# Altium PCB nrf7002_qfaa.PcbDoc
Units mil, origin at the board's own origin, x right, y up, seen from the top; angles counter-clockwise.
Board outline 738 x 600 mil, 4 copper layers (Top Layer, Mid-Layer 1, Mid-Layer 2, Bottom Layer), stack 62.315 mil thick; 22 components, 31 nets, 106 pads, 136 vias.
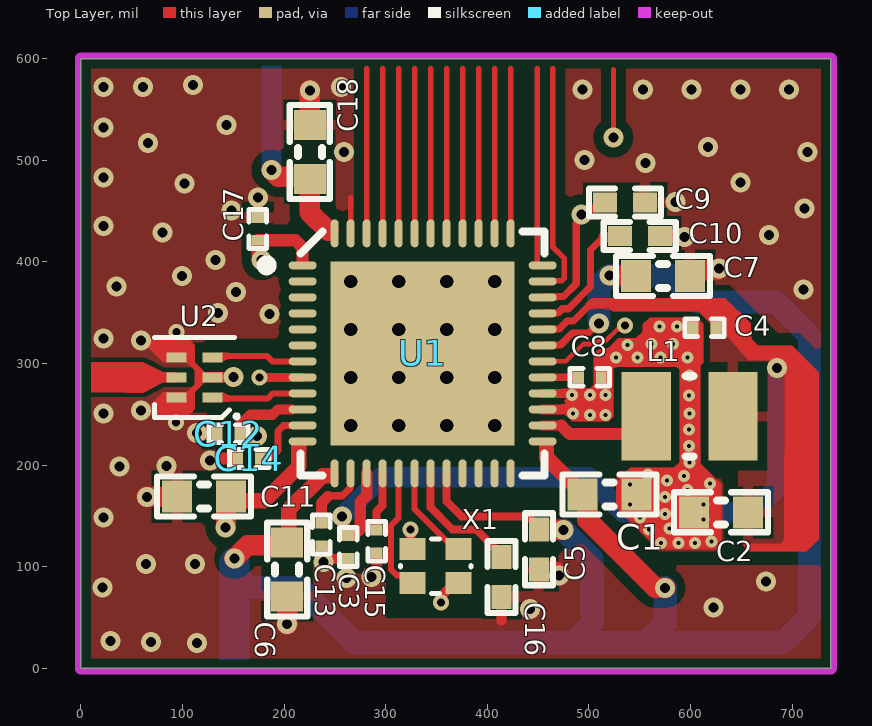
[diagram p0: Top Layer view]
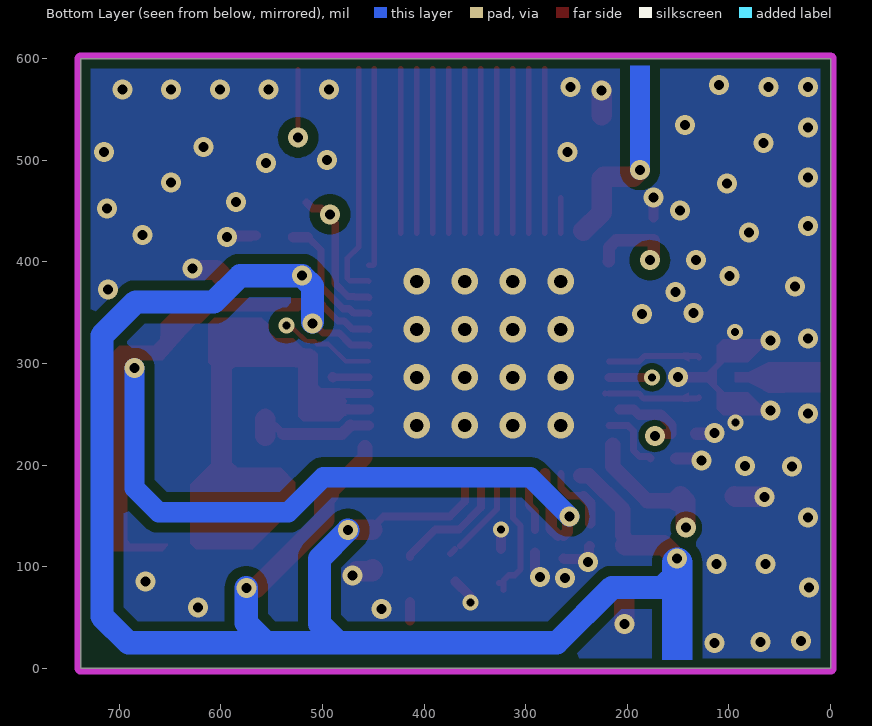
[diagram p1: Bottom Layer view, seen from below]
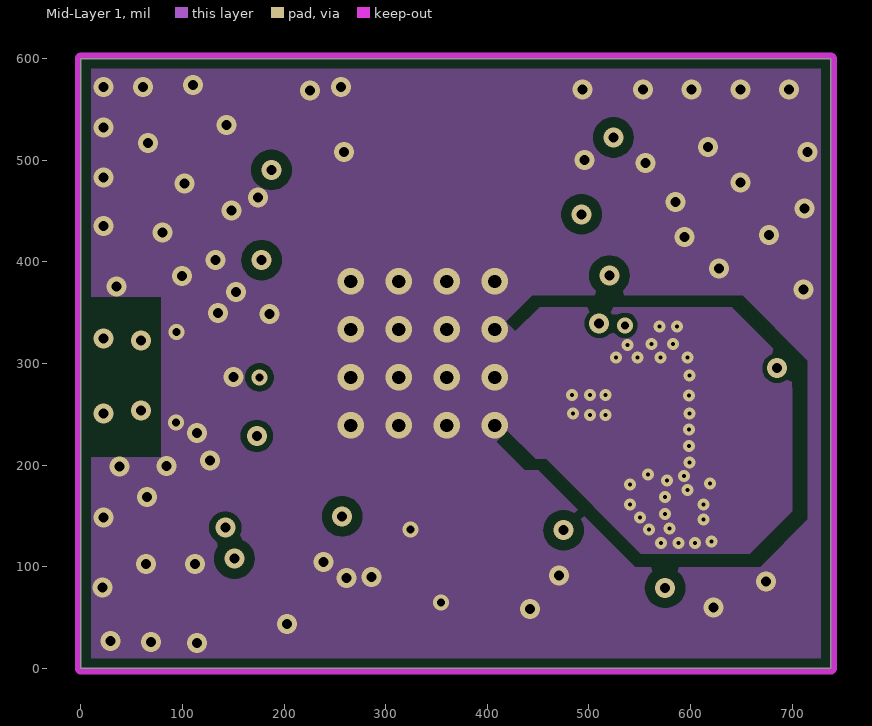
[diagram p2: Mid-Layer 1]
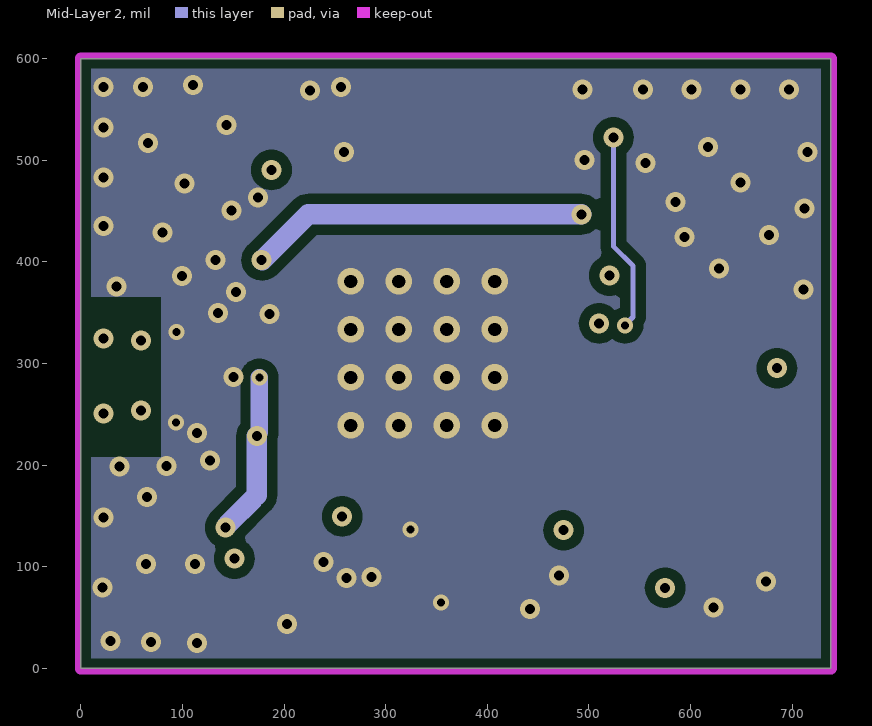
[diagram p3: Mid-Layer 2]
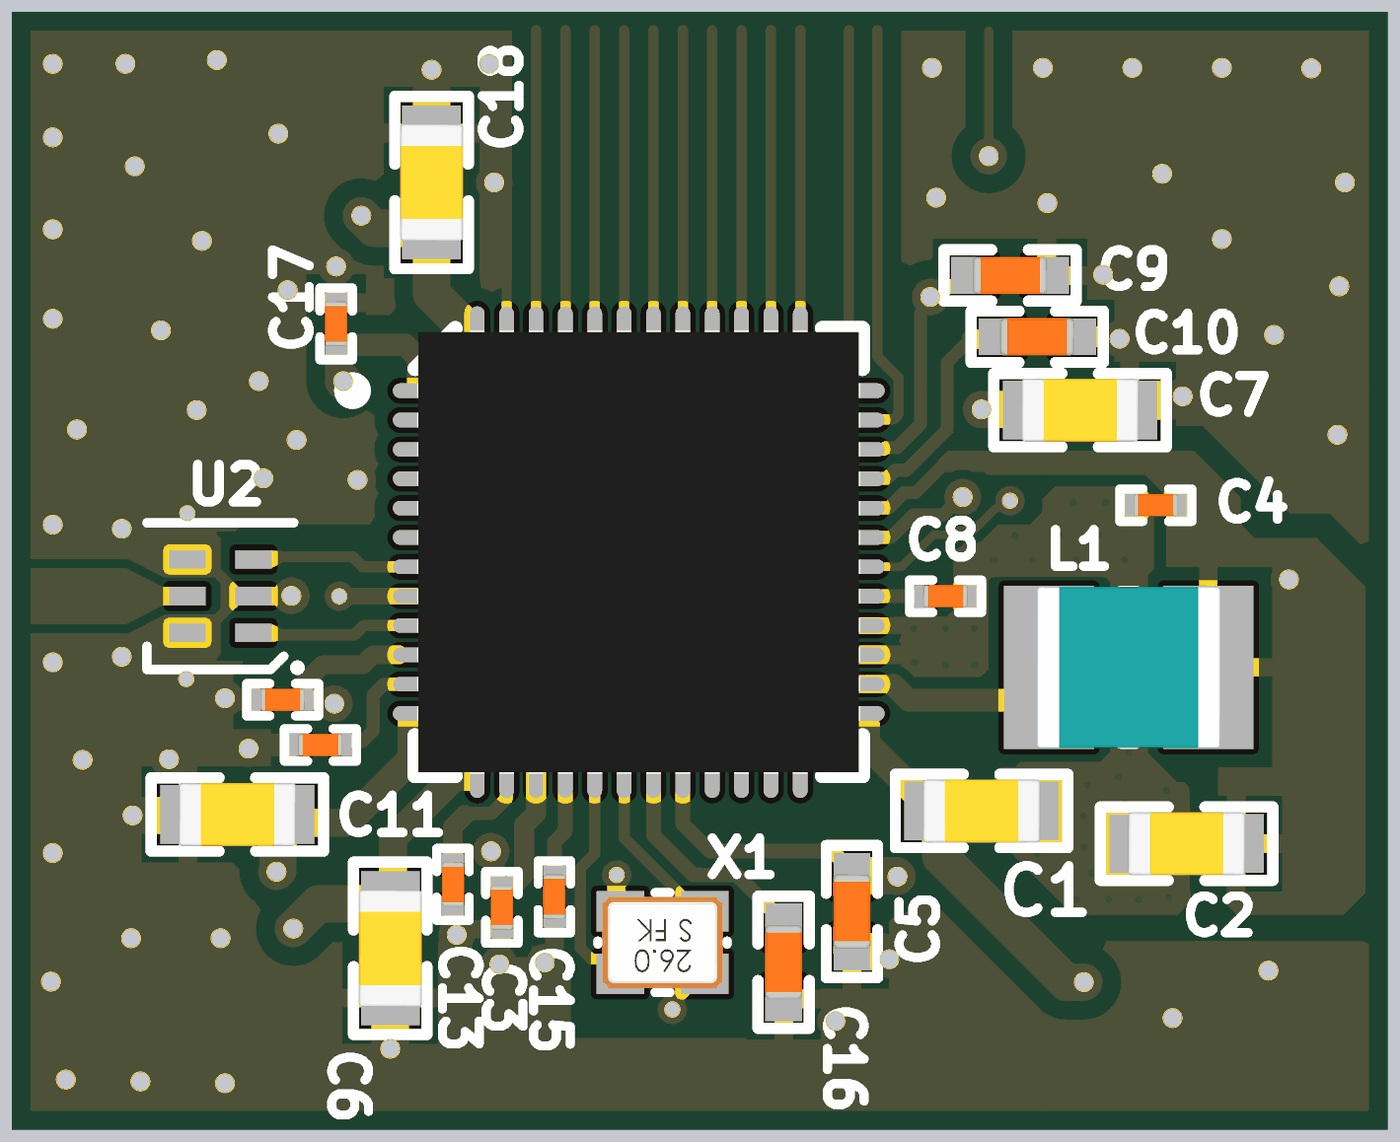
[diagram p4: 3D render of the assembled board from above, using the file's embedded part models]

## Layer stack, top to bottom
Top Solder: solder mask 1.063, Solder Resist, Dk 3.5
Top Layer: signal copper 0.689
Dielectric1: prepreg 3.5, FR-4, Dk 4.2
Mid-Layer 1: signal copper 1.378
Dielectric2: prepreg 51.1811, FR-4, Dk 4.2
Mid-Layer 2: signal copper 1.378
Dielectric3: prepreg 3.5, FR-4, Dk 4.2
Bottom Layer: signal copper 0.689
Bottom Solder: solder mask 1.063, Solder Resist, Dk 3.5

## Board outline
0,0 0,600 738,600 738,0

## Design rules (kind name [scope] priority, off if disabled: settings)
Clearance Clearance_2 [InNet('PALDO') vs OnLayer('Mid-Layer 1')] p1: gap=10 ignorepadtopadclearanceinfootprint=FALSE except(6: Via-Fill Via-Poly Via-Region)
Clearance Clearance_4 [InNet('PALDO') vs OnLayer('Bottom Layer')] p2: gap=10 ignorepadtopadclearanceinfootprint=FALSE except(6: Via-Fill Via-Poly Via-Region)
Clearance Clearance_1 [InNet('ant') vs InNet('GND')] p3: gap=4.76 ignorepadtopadclearanceinfootprint=FALSE except(5: Arc-Arc Arc-Track Arc-Fill Arc-Poly Arc-Region Track-Track Track-Fill Track-Poly Track-Region SMDPad-Fill SMDPad-Poly SMDPad-Region)
Clearance Clearacnce_microvia [AsMM(ViaDiameter) = 0.3 vs AsMM(ViaDiameter) = 0.3] p4: gap=3.94 ignorepadtopadclearanceinfootprint=FALSE
Clearance Polygon_Clearance [(InNamedPolygon('Top_Layer-GND')) or (InNamedPolygon('Bottom_Layer-GND')) or (InNamedPolygon('Mid_Layer_1-GND')) or (InNamedPolygon('Mid_Layer_2-GND'))] p5: gap=10 ignorepadtopadclearanceinfootprint=FALSE except(0: Arc-Hole Track-Hole SMDPad-Hole THPad-Hole Via-Hole Fill-Hole Poly-Hole Region-Hole Text-Hole)
Clearance [All] p6: gap=4.76 ignorepadtopadclearanceinfootprint=FALSE except(5: Arc-Arc Arc-Track Track-Track)
ComponentClearance [All] p1 off: gap=10 collisioncheckmode=3 verticalgap=10 showdistances=FALSE
FabricationTestPointUsage TestPointUsage [All] p1: valid=0 allowmultiple=FALSE
FabricationTestpoint Testpoint [All] p1: side=3 testpointundercomponent=TRUE minsize=40 maxsize=100 preferedsize=60 minholesize=0 maxholesize=40 preferedholesize=32 testpointgrid=1 allowsidetop=TRUE allowsidebottom=TRUE usegrid=TRUE gridtolerance=0.01
Height [All] p1 off: minheight=0 maxheight=1000 prefheight=500
HoleSize [All] p1: absolutevalues=TRUE maxlimit=300 minlimit=3.94 maxpercent=80.000 minpercent=20.000
MinimumAnnularRing [All] p1 off: minimumring=6
PolygonConnect PolygonConnect_1 [isVia and innet(gnd)] p1: connectstyle=Direct reliefconductorwidth=10 reliefentries=4 polygonreliefangle="90 Angle" airgapwidth=10
PolygonConnect [All] p2: connectstyle=Relief reliefconductorwidth=10 reliefentries=4 polygonreliefangle="90 Angle" airgapwidth=10
RoutingVias [All] p1: holewidth=12.01 width=24 viastyle="Through Hole" minholewidth=3.94 minwidth=11.81 maxholewidth=12.01 maxwidth=24.02 useviatemplates=TRUE viatemplateguid#1={EDF5FEF7-A820-4EA2-9A2F-3AF23343353B} viatemplatename#1=v50h25m0mx0
SilkToSolderMaskClearance SilkscreenOverComponentPads [IsPad] p1: minsilkscreentomaskgap=10 clearancetoexposedcopper=TRUE
SolderMaskExpansion [IsVia] p1: expansion=3 istentingtop=TRUE
SolderMaskExpansion SolderMaskExpansion_1 [All] p2: expansion=3 istentingtop=FALSE
Width [All] p1: maxlimit=100 minlimit=4.5 preferedwidth=6 midlayer1_minwidth=4.92 midlayer4_minwidth=4.92 minimp=50.000000 maximp=50.000000 favimp=50.000000
24 further rules are at their usual default settings.

## Components (designator, comment, footprint, x,y, rotation, side; value= is the part's Value field where it differs from the comment)
C1 "4.7µF" CAPC1608X06L 520.13,171.12 r180 top
C2 "4.7µF" CAPC1608X06L 630.12,153.57 r0 top
C3 "0.22µF" CAPC0603X03L_C 262.9,119.37 r90 top
C4 "0.47µF" CAPC0603X03L_C 613.59,335.17 r0 top
C5 "1.0µF" CAPC1005X04L 450.63,117.17 r90 top
C6 "4.7µF" CAPC1608X06L 203,97.43 r90 top
C7 "2.2µF" CAPC1608X06L 573,386.21 r180 top
C8 "10nF" CAPC0603X03L_C 500.84,286.32 r0 top
C9 "2.2µF" CAPC1005X04L 535.42,458.43 r180 top
C10 "1.0µF" CAPC1005X04L 550,425.52 r0 top
C11 "4.7µF" CAPC1608X06L 121,169.26 r0 top
C12 "100nF" CAPC0603X03L_C 145.28,230.81 r180 top
C13 "22nF" CAPC0603X03L_C 236.64,131.71 r90 top
C14 "0.47µF" CAPC0603X03L_C 165.54,206.52 r0 top
C15 "2.2µF" CAPC0603X03L_C 291.02,125.04 r90 top
C16 "1.0µF" CAPC1005X04L 414.02,89.94 r90 top
C17 "100nF" CAPC0603X03L_C 174,432.48 r270 top
C18 "2.2µF" CAPC1608X06L 225.18,508.34 r270 top
L1 "3.3µH" INDC2520X10N 599.04,248.17 r0 top
U1 "nRF7002-QFAA" QFN40P600X600X60-48N 336.31,310 r0 top locked
U2 "Diplexer" CAF-50P160X80-6N 111.9,286.38 r180 top locked value=LFD182G45DCJD247
X1 "40MHz" BT-XTAL_1612 349.03,100.52 r180 top

## Footprints (in the part's own frame and the unit in brackets; to place one, negate y for a bottom-side part, rotate by r counter-clockwise, add the part's x,y. Pads: shape width x height; smd on the part's side, far side on the other; paste and mask are expansions set on the pad)
BT-XTAL_1612 [mm] "Crystal 1.6 x 1.2 mm"
  rect 0.65x0.55 smd: 1(-0.575,-0.425) 2(0.575,-0.425) 3(0.575,0.425) 4(-0.575,0.425)
  silkscreen extent -0.88,-0.68 0.88,0.68, body extent -0.83,-0.63 0.83,0.63, height 0.41
CAF-50P160X80-6N [mm] "Chip Array, Flat, 6-Leads, Pitch 0,50mm,  Body 1,60x0,80mm,  IPC Medium Density"
  rect 0.5x0.25 smd mask+0.08: 1(-0.45,0.5) 2(-0.45,0) 3(-0.45,-0.5) 5(0.45,-0.5) 6(0.45,0) 7(0.45,0.5)
  Top Layer region: 0.786,0.375 0.2,0.375 0,0.175 0,-0.175 0.2,-0.375 0.789,-0.375 1.175,-0.761 1.175,-0.95 0.15,-0.95 0,-0.8 0,-0.375 -0.25,-0.125 -0.8,-0.125 -0.9,-0.225 -1,-0.225 -1,0.225 -0.9,0.225 -0.8,0.125 -0.25,0.125 0,0.375 0,0.8 0.15,0.95 1.175,0.95 1.175,0.764
  silkscreen extent -1.1,-1 1,1.02, body extent -0.53,-0.88 0.47,0.88, height 0.7
CAPC0603X03L_C [mm] "Chip Capacitor, 2-Leads, Body 0.6x0.3mm, IPC High Density"
  rect 0.27x0.3 smd mask+0.05: 1(-0.285,0) 2(0.285,0)
  silkscreen extent -0.49,-0.22 0.49,0.22, body extent -0.3,-0.15 0.31,0.15, height 0.3
CAPC1005X04L [mm] "Chip Capacitor, 2-Leads, Body 1.0x0.5mm, IPC High Density"
  rect 0.6x0.5 smd: 1(-0.5,0) 2(0.5,0)
  silkscreen extent -0.9,-0.35 0.9,0.35, body extent -0.51,-0.25 0.51,0.25, height 0.5
CAPC1608X06L [mm] "Chip Capacitor, 2-Leads, Body 1.6x0.8mm, IPC High Density"
  rect 0.75x0.8 smd: 1(-0.675,0) 2(0.675,0)
  silkscreen extent -1.17,-0.5 1.17,0.5, body extent -0.8,-0.43 0.8,0.43, height 0.8
INDC2520X10N [mm] "Chip Inductor, 2-Leads, Body 2,50x2,00mm, IPC Medium Density"
  rect 1.23x2.22 smd: 1(-1.085,0) 2(1.085,0)
  silkscreen extent -0.1,-1.01 0.1,1.01, body extent -1.25,-1.1 1.25,1.1, height 1.98
QFN40P600X600X60-48N [mm] "QFN, 48-Leads, Body 6.1x6.1mm (max), Pitch 0.40mm, IPC Medium Density"
  oval 0.7x0.2 smd: 1(-3,2.2) 2(-3,1.8) 3(-3,1.4) 4(-3,1) 5(-3,0.6) 6(-3,0.2) 7(-3,-0.2) 8(-3,-0.6) 9(-3,-1) 10(-3,-1.4) 11(-3,-1.8) 12(-3,-2.2) 25(3,-2.2) 26(3,-1.8) 27(3,-1.4) 28(3,-1) 29(3,-0.6) 30(3,-0.2) 31(3,0.2) 32(3,0.6) 33(3,1) 34(3,1.4) 35(3,1.8) 36(3,2.2)
  oval 0.2x0.7 smd: 13(-2.2,-3) 14(-1.8,-3) 15(-1.4,-3) 16(-1,-3) 17(-0.6,-3) 18(-0.2,-3) 19(0.2,-3) 20(0.6,-3) 21(1,-3) 22(1.4,-3) 23(1.8,-3) 24(2.2,-3) 37(2.2,3) 38(1.8,3) 39(1.4,3) 40(1,3) 41(0.6,3) 42(0.2,3) 43(-0.2,3) 44(-0.6,3) 45(-1,3) 46(-1.4,3) 47(-1.8,3) 48(-2.2,3)
  rect 4.6x4.6 smd paste-5: 49(0,0)
  silkscreen extent -4.02,-3.05 3.05,3.05, body extent -3.02,-3.02 3.02,3.02, height 0.86

## Part data
C1 C2 C6 C11: library part C0603-4µ7-25V-X6S-GRM188C81E475KE11, "Capacitor, Ceramic, X6S,±10%, 25V", Component Class=Capacitors, Footprint Doc=0603, Pad Count=2, Part Number=C0603-4µ7-25V-X6S-GRM188C81E475KE11
C3: library part C0201-220n-10V-X5R-GRM033R61A224KE90, "Capacitor, Ceramic, X5R, ±10%, 10V", Component Class=Capacitors, Footprint Doc=0201, Pad Count=2, Part Number=C0201-220n-10V-X5R-GRM033R61A224KE90
C4 C14: library part C0201-470n-6.3V-X5R-GRM033R60J474KE90, "Capacitor, Ceramic, X5R,±10%, 6.3V", Component Class=Capacitors, Footprint Doc=0201, Pad Count=2, Part Number=C0201-470n-6.3V-X5R-GRM033R60J474KE90
C5: library part C0402-1µ0-35V-X5R-GRM155R6YA105KE11, "Capacitor, Ceramic, X5R,±10%, 35V", Component Class=Capacitors, Footprint Doc=0402, Pad Count=2, Part Number=C0402-1µ0-35V-X5R-GRM155R6YA105KE11
C7 C18: library part C0603-2µ2-16V-X7S-GRM188C71C225KE11, "Capacitor, Ceramic, X7S,±10%, 16V", Component Class=Capacitors, Footprint Doc=0603, Pad Count=2, Part Number=C0603-2µ2-16V-X7S-GRM188C71C225KE11
C8: library part C0201-10n-16V-X7R-GRM033R71C103KE14, "Capacitor, Ceramic, X7R,±10%, 16V", Component Class=Capacitors, Footprint Doc=0201, Pad Count=2, Part Number=C0201-10n-16V-X7R-GRM033R71C103KE14
C9: library part C0402-2µ2-25V-X5R-GRM155R61E225KE11, "Capacitor, Ceramic, X5R,±10%, 25V", Component Class=Capacitors, Footprint Doc=0402, Pad Count=2, Part Number=C0402-2µ2-25V-X5R-GRM155R61E225KE11
C10: library part C0402-1µ0-16V-X6S-GRM155C81C105KE11D, "Capacitor, Ceramic, X6S,±10%, 16V", Component Class=Capacitors, Footprint Doc=0402, Pad Count=2, Part Number=C0402-1µ0-16V-X6S-GRM155C81C105KE11D
C12 C17: library part C0201-100n-16V-X7S-GRM033C71C104KE14, "Capacitor, Ceramic, X7S,±10%, 16V", Component Class=Capacitors, Footprint Doc=0201, Pad Count=2, Part Number=C0201-100n-16V-X7S-GRM033C71C104KE14
C13: library part C0201-22n-10V-X5R-GRM033R61A223KE84, "Capacitor, Ceramic, X5R,±10%, 10V", Component Class=Capacitors, Footprint Doc=0201, Pad Count=2, Part Number=C0201-22n-10V-X5R-GRM033R61A223KE84
C15: library part C0201-2µ2-10V-X5R-GRM033R61A225KE47, "Capacitor, Ceramic, X5R,±10%, 10V", Component Class=Capacitors, Footprint Doc=0201, Pad Count=2, Part Number=C0201-2µ2-10V-X5R-GRM033R61A225KE47
C16: library part C0402-1µ0-10V-X7S-GRM155C71A105KE11, "Capacitor, Ceramic, X7S,±10%, 10V", Component Class=Capacitors, Footprint Doc=0402, Pad Count=2, Part Number=C0402-1µ0-10V-X7S-GRM155C71A105KE11
L1: library part L1008-3µ3-LQM2HPN3R3MGCL, "Inductor, 1A, ±20%, 200mOhm", Component Class=Inductors, Footprint Doc=1008, Pad Count=2, Part Number=L1008-3µ3-LQM2HPN3R3MGCL
U1: library part nRF7002-QFAAB0, "Wi-fi Dual Band Companion chip", Manufacturer="Nordic Semiconductor", Component Class=Nordic_Devices, Footprint Doc=QFN-48, Manufacturer Part Number=nRF7002-QFAAB0, Pad Count=49, Part Number=nRF7002-QFAAB0
U2: library part LFD182G45DCJD247, "Signal Conditioning 2.4GHz and 5GHz Diplexer", Manufacturer=Murata, Component Class=Filters, Footprint Doc=CAF, Manufacturer Part Number=LFD182G45DCJD247, Pad Count=6, Part Number=LFD182G45DCJD247
X1: library part XTAL_SMD1612_40MHz_8pF, "XTAL SMD 1612, 40MHz, Cl=8pF, Total Tol: ±10ppm", Component Class=Oscillators, Footprint Doc=XTAL_1612, Pad Count=4, Part Number=XTAL_SMD1612_40MHz_8pF

## Free pads (board coordinates)
  rrect50% 43.31x43.31 on Top Paste paste+0.49 mask+1.97: ""(275.8,369.67) ""(277.8,250.47) ""(277.8,309.52) ""(337,250.47) ""(337,309.52) ""(337,369.67) ""(396.06,250.47) ""(396.06,309.52) ""(396.06,369.67)

## Via types
v1: diameter 19.68, hole 9.84, Top Layer to Bottom Layer, tented both sides, 75 vias
v2: diameter 11.81, hole 3.94, Top Layer to Mid-Layer 1, tented top, 39 vias
v3: diameter 25.98, hole 12.99, Top Layer to Bottom Layer, tented both sides, 16 vias
v4: diameter 15.75, hole 7.87, Top Layer to Bottom Layer, tented both sides, 6 vias

## Nets (pads, with @x,y where several pads share a name; then routed paths per layer and width w, separated by ;. In a path a pad name is that pad's centre, name@x,y a point inside that pad or via, vN(x,y) a via of type N, cw(c..) or ccw(c..) an arc to the next point about the centre after c; other vN are vias at no path point)
ANT: U2.6
BUCK_EN: U1.30 | length 395
  Top Layer w4.5: U1.30 477.13,302.13 494.19,319.19 505.69,319.19 508.3,321.81 516.14,321.81 527.81,333.48 528.3,333.48 532.37,337.56 v4(535.42,337.56)
  Top Layer w4.92: v1(524,522.48) 524,589.54 524,559
  Mid-Layer 2 w4.92: v1@524,528 v1(524,522.48) 524,415.4 543.29,396.11 543.29,345.86 535.42,337.98 v4(535.42,337.56)
COEX_GRANT: U1.43 | length 161.9
  Top Layer w5.5: U1.43 328.43,590
COEX_REQ: U1.42 | length 161.9
  Top Layer w5.5: U1.42 344.18,590
COEX_STATUS: U1.41 | length 161.9
  Top Layer w5.5: U1.41 359.93,590
GND: C1.1 C2.1 C3.1 C4.1 C5.1 C6.1 C7.1 C8.2 C9.1 C10.2 C11.1 C12.2 C13.1 C14.1 C15.1 C16.1 C17.1 C18.1 U1.27 U1.28 U1.47 U1.49 U2.2 U2.5 U2.7 X1.2 X1.4 | length 482.9
  Top Layer w5.5: U1.47 265.44,463.26
  Top Layer w9: U1.28 482.35,270.63 483.52,269.46 v2(483.52,269.04)
  Top Layer w9.84: C17.1 v1(174,463.26) ; C13.1 237.23,120.49 237.62,120.1 237.62,105.65 v1(238.64,104.63) 241.3,104.63 244.43,107.76 262.5,107.76 C3.1 ; X1.2@324.39,117.26 v4(324.39,136.78) ; v4(354.3,64.62) 355.43,65.75 355.43,71.53 X1.4@369.35,85.45 ; 414.02,47 C16.1@414.02,65.25 ; U1.27 479.65,254.88 483.77,250.76 v2(484.3,250.76) ; C10.2@565.59,426.22 v1@592.4,426.22 ; C10.2 570.21,425 593.62,425 v1(594.15,424.47)
  Top Layer w10: v1(285.9,89.8) 285.9,92.42 291.02,97.54 C15.1
  Top Layer w12: v1(114.34,231.58) 115.12,230.81 C12.2@132.38,230.81 ; v1(127,204.52) 129.08,204.52 130.99,206.44 151.83,206.44 C14.1@151.91,206.52
  Top Layer w20: v1(64.8,168.72) 93.89,168.72 C11.1 ; v1(203,43.52) C6.1 ; C18.1@225.18,544.47 v1(225.18,568.85) ; C5.1 450.63,95.83 450.79,95.67 466.5,95.67 v1(470.63,91.54) ; C7.1 599.57,387.2 604.34,391.96 626.39,391.96 v1(628,393.57)
  other v1: 114.34,25 69,26 29,27 441.79,58.44 622.59,60 21,79.52 674,85.45 261.55,88.82 64,102.83 112,102.83 22,148.52 38,198.52 84.34,198.89 22,250.85 59,253.88 149.99,286.56 59,322.52 22,324.73 185.49,348.71 135,349.56 152.75,370.16 711,373 35,375.81 99.19,386.21 132.52,401.74 677,426.52 80,429 22,435.2 148,450.52 712,452.59 585.35,458.87 102,477 649.02,478 22,483.2 555.43,497.24 495.81,500.18 258.77,508.34 715,508.34 617,513 66,517 22,532.52 143,534.52 493.55,569.85 553.02,569.85 601.02,569.85 649.02,569.85 697,569.52 22,572 61,572 256,572 110,574
  other v2: 571,123.52 588.13,123.52 604.34,123.52 620.47,124.82 559.01,136.78 579,137.82 612.6,146.26 550,148.25 575,151.69 540.15,161.13 612.6,161.13 575,168.47 597.05,175.43 540.15,181.07 619.16,181.98 576.94,185 593.59,189.43 557.87,190.8 599.04,202.43 598.59,218.64 598.59,235.02 500.84,249.52 516.31,249.52 599.04,250.76 598.59,268.43 500.84,269.04 516.31,269.04 599.04,288.11 526.7,305.78 547.59,305.83 570.59,305.78 596.73,305.83 538.13,318.42 561.59,319.43 582.59,319.43 569.46,336.43 586.59,336.43
  other v3: 265.44,239.13 312.69,239.13 359.93,239.13 407.17,239.13 265.44,286.38 312.69,286.38 359.93,286.38 407.17,286.38 265.44,333.62 312.69,333.62 359.93,333.62 407.17,333.62 265.44,380.87 312.69,380.87 359.93,380.87 407.17,380.87
  other v4: 93.58,241.92 94.18,330.84
IRQ: U1.46 | length 161.9
  Top Layer w5.5: U1.46 281.19,590
NetC8_1: C8.1 U1.29 | length 35.6
  Top Layer w7.5: U1.29@454.48,286.32 C8.1
  Top Layer w10: C8.1 C8.1@489.93,286.63
NetC10_1: C10.1 U1.33 | length 142.3
  Top Layer w7: U1.33 454.58,349.54 469.24,349.54 473.64,353.94 479.76,353.94 501.63,375.81 501.63,411.66 514,424.02 515.73,424.02 ; C10.1@528.82,424.02 C10.1
  Top Layer w10: 514.5,424.44 C10.1@528.4,424.44 ; 515.73,424.02 C10.1@528.82,424.02
NetC13_2: C13.2 U1.14 | length 68.8
  Top Layer w7: 242.97,169.04 243.75,169.81 257.29,169.81 265.27,177.8 265.27,191.72 U1.14
  Top Layer w10.5: C13.2 236.64,162.7 242.97,169.04
NetC15_2: C15.2 U1.16 | length 58.1
  Top Layer w8: C15.2 291.02,154.38 296.46,159.82 296.46,160.85 296.87,161.26 296.87,191.83 U1.16
NetC16_2: C16.2 U1.19 | length 124.8
  Top Layer w7.87: U1.19 344.18,158.16 365.49,136.85 369.12,136.85 369.19,136.78 388.83,136.78 414.02,111.59 C16.2
NetL1_1: L1.1 U1.26 | length 132.3
  Top Layer w7.78: L1.1@538.68,230.52 L1.1
  Top Layer w10: U1.26 472.36,239.13 472.74,238.75
  Top Layer w12: 472.74,238.75 480.97,230.52 L1.1@538.68,230.52
  Top Layer w15: L1.1@556.33,245.39 L1.1
  Top Layer w20: L1.1@556.33,228.68 L1.1@556.33,245.39
NetU1_17: U1.17 X1.3 | length 133.2
  Top Layer w6: U1.17 312.69,148.12 305,140.43 305,97.43 310.81,91.62 316.6,91.62 322.01,86.21 322.01,83.79 X1.3 ; X1.3@322.01,77.11 X1.3@322.01,84.21
NetU1_18: U1.18 X1.1 | length 92.7
  Top Layer w6: U1.18 328.43,156.67 X1.1@364.64,120.47
  Top Layer w6.5: X1.1@369.67,117.26 X1.1@374.14,112.78
PALDO: C11.2 C12.1 U1.8 U1.10 U1.12 | length 418.7
  Top Layer w9: v4@175.74,286.38 U1.8
  Top Layer w10: C12.1 156.82,231.12 156.82,239.64 166.7,249.52 188.52,249.52 193.87,254.88 U1.10@207.75,254.88 ; C12.1@158.13,231.58 159.18,230.53 171.15,230.53 v1(173,228.68)
  Top Layer w15: C11.2@151.94,164.89 180.41,164.89 214.42,198.89 U1.12@214.42,219.82
  Top Layer w20: v1@142.81,139.34 142.81,164.49 C11.2 C11.2@151.94,164.89
  Mid-Layer 2 w17: 169.79,167.11 173,170.32 ; v1(173,228.68) 173,229.4 v1@175.68,232.08 ; v1@175.55,232.09 v4@175.55,286.32
  Mid-Layer 2 w20: v1@143.8,141.12 169.79,167.11 ; 173,170.32 v1(173,228.68)
  other v1: 142,138.52
  other v4: 175.68,286.32
PWRIOVDD: C9.2 C17.2 U1.1 U1.34 | length 551.7
  Top Layer w7: U1.34 454.58,365.29 468.01,365.29 468.28,365.56 468.67,365.94 474.79,365.94 487.43,378.58 487.43,438.24 492.65,443.45 v1(492.65,446.88)
  Top Layer w8: v1(492.65,446.88) 495.81,446.88 501.52,452.59 509.89,452.59 C9.2
  Top Layer w12: v1(177.82,401.74) 177.82,402.4 174,406.21 C17.2 211.01,421.26 218.04,414.23 218.04,400.71 218.2,400.55
  Mid-Layer 2 w20: v1@178.4,401.74 223.54,446.88 v1(492.65,446.88)
QSPI_CLK/SPI_CLK: U1.35 | length 233.3
  Top Layer w5.5: U1.35 454.87,381.32 472.94,381.32 475.71,384.09 475.71,403.44 464.26,414.89 464.26,590
QSPI_DATA0/SPI_MOSI: U1.37 | length 161.9
  Top Layer w5.5: U1.37 422.92,590
QSPI_DATA1/SPI_MISO: U1.38 | length 161.9
  Top Layer w5.5: U1.38 407.17,590
QSPI_DATA2: U1.39 | length 161.9
  Top Layer w5.5: U1.39 391.42,590
QSPI_DATA3: U1.40 | length 161.9
  Top Layer w5.5: U1.40 375.68,590
QSPI_SS/SPI_SS: U1.36 | length 198.2
  Top Layer w5.5: 449,590 449,397.71 450.1,396.61 U1.36
SW_CTRL0: U1.44 | length 161.9
  Top Layer w5.5: U1.44 312.68,590
SW_CTRL1: U1.45 | length 161.9
  Top Layer w5.5: U1.45 296.94,590
SXLDO: C14.2 U1.11 | length 66.4
  Top Layer w7: C14.2 C14.2@177.05,206.23 ; C14.2@176.76,207.11 178.07,208.43 188.04,208.43 193.87,214.26 193.87,233.45 199.56,239.13 U1.11
TXRF0: U1.9 U2.1 | length 91.2
  Top Layer w6: U2.1 130.78,265.52 183.72,265.52 188.83,270.63 U1.9
TXRF1: U1.7 U2.3 | length 91.4
  Top Layer w6: U2.3 131.07,307.52 182.91,307.52 188.31,302.13 U1.7
VBAT: C1.2 C5.2 C6.2 C7.2 U1.13 U1.20 U1.25 U1.31 | length 1999.5
  Top Layer w7: U1.31 454.58,318.04 471.68,318.04 483.58,329.94 499.57,329.94 v1@505.44,335.81
  Top Layer w7.87: U1.20 359.93,164.25 374.52,149.66 439.79,149.66 C5.2@450.63,138.82
  Top Layer w15: C6.2 203,129.85 204.42,131.26 204.42,156.17 237.68,189.43 U1.13@245.76,189.43 ; 458.2,217.32 458.2,207.46 C1.2@493.55,172.1
  Top Layer w20: v1(151,108) 164.24,121.24 C6.2@202,121.24 ; C5.2@451.05,136.38 v1@474.55,136.38 ; C1.2 498.32,166.35 498.32,146.26 565.32,79.26 v1(575,79.26) ; v1(520.13,386.54) 546.1,386.54 C7.2
  Bottom Layer w23: 151,94.17 165.64,79.52 215.03,79.52 269.55,25 484,25 ; v1(475.02,135.9) 503,107.93 503,44 484,25 ; v1@509.89,341.07 509.89,376.3 v1(520.13,386.54) 580.99,386.54 607,360.52 684,360.52 717,327.52 717,51 691,25 555.37,25 ; v1(575,79.26) 575,44.63 555.37,25 ; 484,25 555.37,25
  Bottom Layer w30: 151,23 151,94.17 v1@151,104
  other v1: 510.02,339.52
VDD_BUCK: C2.2 C3.2 C4.2 L1.2 U1.15 U1.32 | length 764.1
  Top Layer w7: U1.32 454.58,333.79 470.46,333.79 478.61,341.94 484.83,341.94 500.51,357.63 515.73,357.63
  Top Layer w10.98: v1@258.77,147.79 v1(257.1,149.45) 257.1,147.1 256.86,146.85 257.34,146.85 258.77,145.43 258.77,134.48 262.66,130.59 C3.2 ; C3.2@268.33,130.77 274.86,137.3 274.86,163.52 281.19,169.84 U1.15 ; 611.37,355.43 622.59,344.22
  Bottom Layer w20: v1(257.1,149.45) 295.65,188 499.13,188 533.63,153.51 661.39,153.51 685,177.12 v1@685,295.52
  other v1: 685,295.35
VDDIO: C18.2 U1.48 | length 180.7
  Top Layer w20: v1(187.5,490.52) 194.24,483.76 223.18,483.76 C18.2 225.18,448.6 243.25,430.52
  Bottom Layer w20: v1(187.5,490.52) 187.5,571.17
pads on no net: U1.2 U1.3 U1.4 U1.5 U1.6 U1.21 U1.22 U1.23 U1.24

## Polygon pours and split planes (outlines as drawn)
GND on Mid-Layer 1 "Mid_Layer_1-GND" (solid, remove dead copper, pour order 41): 0,0 0,600 738,600 738,0
GND on Mid-Layer 1 "NONET_L-01_P-001" (solid, pour order 38): 659.08,114.5 699.4,154.82 699.4,296.48 640.45,355.43 451.21,355.43 418.57,322.8 418.57,234.84 447.38,206.04 458.17,206.04 549.72,114.5
ANT on Top Layer "NONET_L-01_P-001" (solid, pour order 33): 61.49,271.38 81.2,281.46 94.18,281.46 94.18,291.3 81.2,291.3 61.5,301.38 45.11,301.38 45.11,271.38
GND on Top Layer "Top_Layer-GND" (solid, remove dead copper, pour order 44): 0,0 0,600 738,600 738,0
GND on Top Layer "NONET_L-01_P-001" (solid, pour order 19): 472.94,249.52 475.63,249.52 482.08,243.07 519.55,243.07 524.02,247.54 524.02,295.21 525.21,296.4 586.58,296.4 589.14,293.77 589.14,202.99 583.59,197.43 540.82,197.43 525.21,181.82 525.21,160.7 568.82,117.09 624.81,117.09 630.12,122.4 630.12,181.38 624.33,187.17 624.18,187.17 609.33,202.02 609.33,298.01 609.71,298.01 612.6,300.9 612.6,339.3 606.65,345.25 559.6,345.25 552.75,338.4 552.75,331.48 546,324.73 519.88,324.73 504.74,309.59 504.74,279.1 501.17,275.52 472.94,275.52
VDD_BUCK on Top Layer "NONET_L-01_P-001" (solid, pour order 34): 710.91,111.43 726,126.52 726,291.48 699.94,317.54 681.49,317.54 681.37,317.65 666.38,317.64 659.59,324.43 659.59,339.06 634.21,364.43 542.97,364.43 497,364.43 497,353.02 521.66,353.02 523.25,351.43 607.59,351.43 619.16,339.86 619.16,309.77 619.19,309.74 619.16,309.71 619.16,205.16 643.89,180.43 643.89,128.78 661.24,111.43
GND on Mid-Layer 2 "Mid_Layer_2-GND" (solid, remove dead copper, pour order 43): 0,0 0,600 735,600 735,0
GND on Bottom Layer "Bottom_Layer-GND" (solid, remove dead copper, pour order 6): 0,0 0,600 738,600 738,0

## Keep-outs
Keep-Out Layer:
  lines w6: -3,-0.09 -3,599.91 ; 0,-3 cw(c0,0) -3,0 ccw(c0,0) 0,-3 ; 0,-3 738,-3 ; 0,603 ccw(c0,600) -3,600 cw(c0,600) 0,603 ; 0,603 738,603 ; 738,-3 ccw(c738,0) 741,0 ; 738,-3 ccw(c738,0) 741,0 ; 738,603 cw(c738,600) 741,600 ; 738,603 cw(c738,600) 741,600 ; 741,0 741,600

## Other copper
Top Layer:
  rectangle net ANT: 10,271.37 47.49,301.37
  region net GND: 526.7,183.32 540.82,197.43 583.58,197.43 589.14,202.98 589.14,293.79 586.03,296.9 527.34,296.9 527.34,296.4 525.21,296.4 524.02,295.21 524.02,247.54 519.55,243.07 483.7,243.07 480.15,246.6 479.09,247.5 477.64,248.38 476.8,248.72 477.3,249.97 472.94,249.99 472.93,259.8 477.3,259.8 476.7,261.26 475.78,262.75 476.72,264.3 477.48,266.13 472.95,266.15 472.91,275.17 481.91,275.13 482.56,275.53 501.17,275.52 504.74,279.1 504.74,309.57 507.6,312.43 508.36,312.66 509.7,313.37 510.62,314.13 511.25,314.76 516.37,314.76 517.33,314.85 518.88,315.31 520.07,315.95 521.09,316.81 529.02,324.73 546,324.73 552.76,331.48 552.75,338.41 559.6,345.25 606.65,345.25 612.6,339.31 612.6,300.89 609.72,298.01 609.33,298.01 609.32,202.01 630.12,181.37 630.13,122.4 624.8,117.08 568.81,117.09 526.69,159.22
  region net VDD_BUCK: 700.99,115.3 657.39,115.33 652.28,120.5 652.28,123.01 689.08,122.84 692.26,126.96 692.43,295.05 684.74,303.01 657.06,303 633.89,329.53 612.78,351.58 607.59,351.43 523.24,351.43 521.66,353.02 518.64,356 496.99,355.98 496.99,359.26 502.17,364.43 634.21,364.43 659.22,339.42 659.22,327.13 659.58,326.76 659.59,324.43 666.37,317.64 681.37,317.65 681.49,317.54 699.94,317.54 726.01,291.48 726,127 714.3,115.3
  region net ANT: 61.5,301.38 81.2,291.3 94.18,291.3 94.18,281.46 81.2,281.46 61.5,271.38 45.11,271.38 45.11,301.37
  pour cut-out: 205.57,320.66 205.57,324.73 123.76,324.73 119.77,320.74 119.77,310.98 205.57,310.98
  pour cut-out: 438,345.22 481.7,345.22 502.36,365.88 540.17,365.88 634.46,365.88 659.22,341.13 659.21,327.12 665.91,320.43 700.78,320.43 726,295.22 726,127 714.3,115.3 569.13,115.3 526.7,157.74 526.7,196.52 493.58,229.64 442.78,229.64 429.25,229.64 429.25,218.52 448.1,218.36 565.03,101.43 687.92,101.43 723.83,101.43 738,115.61 738,299.42 711.99,325.43 706.92,330.5 685.65,330.5 638.46,377.69 631.73,377.69 544.22,377.69 501.17,377.69 479.1,355.63 438,355.63
  pour cut-out: 124,252.52 123.98,252.51 123.98,245.39 144.22,245.39 144.22,252.1 123.98,252.1
  pour cut-out: 299.72,62.25 299.72,148.66 399,148.66 399,49.36 299.72,49.36
  pour cut-out: 615.15,196.52 625.15,186.52 629,186.52 629,195.52 628,196.52
  pour cut-out: 444,355.52 434.73,355.52 426.86,347.65 426.86,219.32 426.18,218.64 444.39,218.64 444.39,227.83 440.79,231.44 440.79,345.43 444.39,345.43 444.39,355.43
  pour cut-out: 621.01,110.55 632.44,122.82 632.44,204.46 647,204.46 647,119.07 655.42,110.65 655.42,101.31 621.01,101.31
Mid-Layer 1:
  pour cut-out: 409.23,223.15 419.72,233.64 447.83,205.52 458,205.52 551.11,112.42 658.38,112.42 700.65,154.69 700.65,295.23 640.36,355.52 450,355.52 450,366.53 651.26,366.53 715,302.79 715,146.62 668.45,100.08 545.45,100.08 450,195.52 436.86,195.52
  pour cut-out: 453,366.52 444,366.52 418.54,341.07 427.09,332.52 428.49,332.52 451.49,355.52 453,355.52
  pour cut-out: -3.22,365.5 79,365.46 79,207.52 -1.94,207.52
Mid-Layer 2:
  pour cut-out: -3.28,365.52 79,365.52 79,207.52 -2.28,207.52
Bottom Layer:
  rectangle net VDDIO: 177.5,569.88 197.5,593.36
  rectangle net VBAT: 136,8 166,36

## Silkscreen, mask and mechanical layers (free items; w line width, h text height)
Board Outline:
  the board outline again, w6
Top Assembly:
  lines w5: 126.36,320.8 84.25,320.8 84.25,256.29 86.33,254.21 111.09,254.21 128.75,271.87 128.75,319.61
  text "U2" at 96.44,302.84 h12
Top Top Impedance Info (Mech11):
  rectangle: -0.53,271.38 47.01,301.38
  lines w4: 40.96,266.21 41.49,266.21 45.66,262.04 36.67,262.04 41.03,266.4 41.03,255.33 ; 214.07,320.49 214.6,320.49 218.78,316.32 209.78,316.32 214.15,320.68 214.15,309.6 ; 235.87,279.36 235.87,279.46 242.68,286.28 242.68,321.14 237.57,316.02 248.75,316.02 243.16,321.61
  lines w6: 126.11,307.52 182.91,307.52 188.28,302.15 227.68,302.15 228.05,301.78 ; 127.7,265.52 183.72,265.52 188.83,270.63 228.66,270.63 229,270.29
  lines w30: 14.97,286.38 54.97,286.38
  text "50 ohm  / Microstrip" at 122,266.02 h30
  text "50 ohm  / co-planar" at -450,111.61 h30
Top Via Capping:
  circle w3.94: c612.6,161.13 r1.68
  circle w3.94: c575,168.47 r1.68
  circle w3.94: c597.05,175.43 r1.68
  circle w3.94: c619.16,181.98 r1.68
  circle w3.94: c576.94,185 r1.68
  circle w3.94: c547.59,305.83 r1.68
  circle w3.94: c557.87,190.8 r1.68
  circle w3.94: c570.59,305.78 r1.68
  circle w3.94: c593.59,189.43 r1.68
  circle w3.94: c596.73,305.83 r1.68
  circle w3.94: c598.59,218.64 r1.68
  circle w3.94: c598.59,235.02 r1.68
  circle w3.94: c598.59,268.43 r1.68
  circle w3.94: c599.04,202.43 r1.68
  circle w3.94: c599.04,250.76 r1.68
  circle w3.94: c599.04,288.11 r1.68
  circle w3.94: c569.46,336.43 r1.68
  circle w3.94: c586.59,336.43 r1.68
  circle w3.94: c526.7,305.78 r1.68
  circle w3.94: c538.13,318.42 r1.68
  circle w3.94: c561.59,319.43 r1.68
  circle w3.94: c582.59,319.43 r1.68
  circle w3.94: c500.84,249.52 r1.68
  circle w3.94: c500.84,269.04 r1.68
  circle w3.94: c516.31,269.04 r1.68
  circle w3.94: c483.52,269.04 r1.68
  circle w3.94: c484.3,250.76 r1.68
  circle w3.94: c516.31,249.52 r1.68
  circle w3.94: c579,137.82 r1.68
  circle w3.94: c575,151.69 r1.68
  circle w3.94: c571,123.52 r1.68
  circle w3.94: c588.13,123.52 r1.68
  circle w3.94: c620.47,124.82 r1.68
  circle w3.94: c604.34,123.52 r1.68
  circle w3.94: c612.6,146.26 r1.68
  circle w3.94: c559.01,136.78 r1.68
  circle w3.94: c550,148.25 r1.68
  circle w3.94: c540.15,161.13 r1.68
  circle w3.94: c540.15,181.07 r1.68

## Dimensions
738,0 to 738,600 on Dimension
0,0 to 738,0 on Dimension